# Altium PCB 车身411.pcbdoc
Units mil, origin at the board's own origin, x right, y up, seen from the top; angles counter-clockwise.
Board outline 4935 x 4957.5 mil, 2 copper layers (Top Layer, Bottom Layer); 16 components, 44 nets, 166 pads, 0 vias.
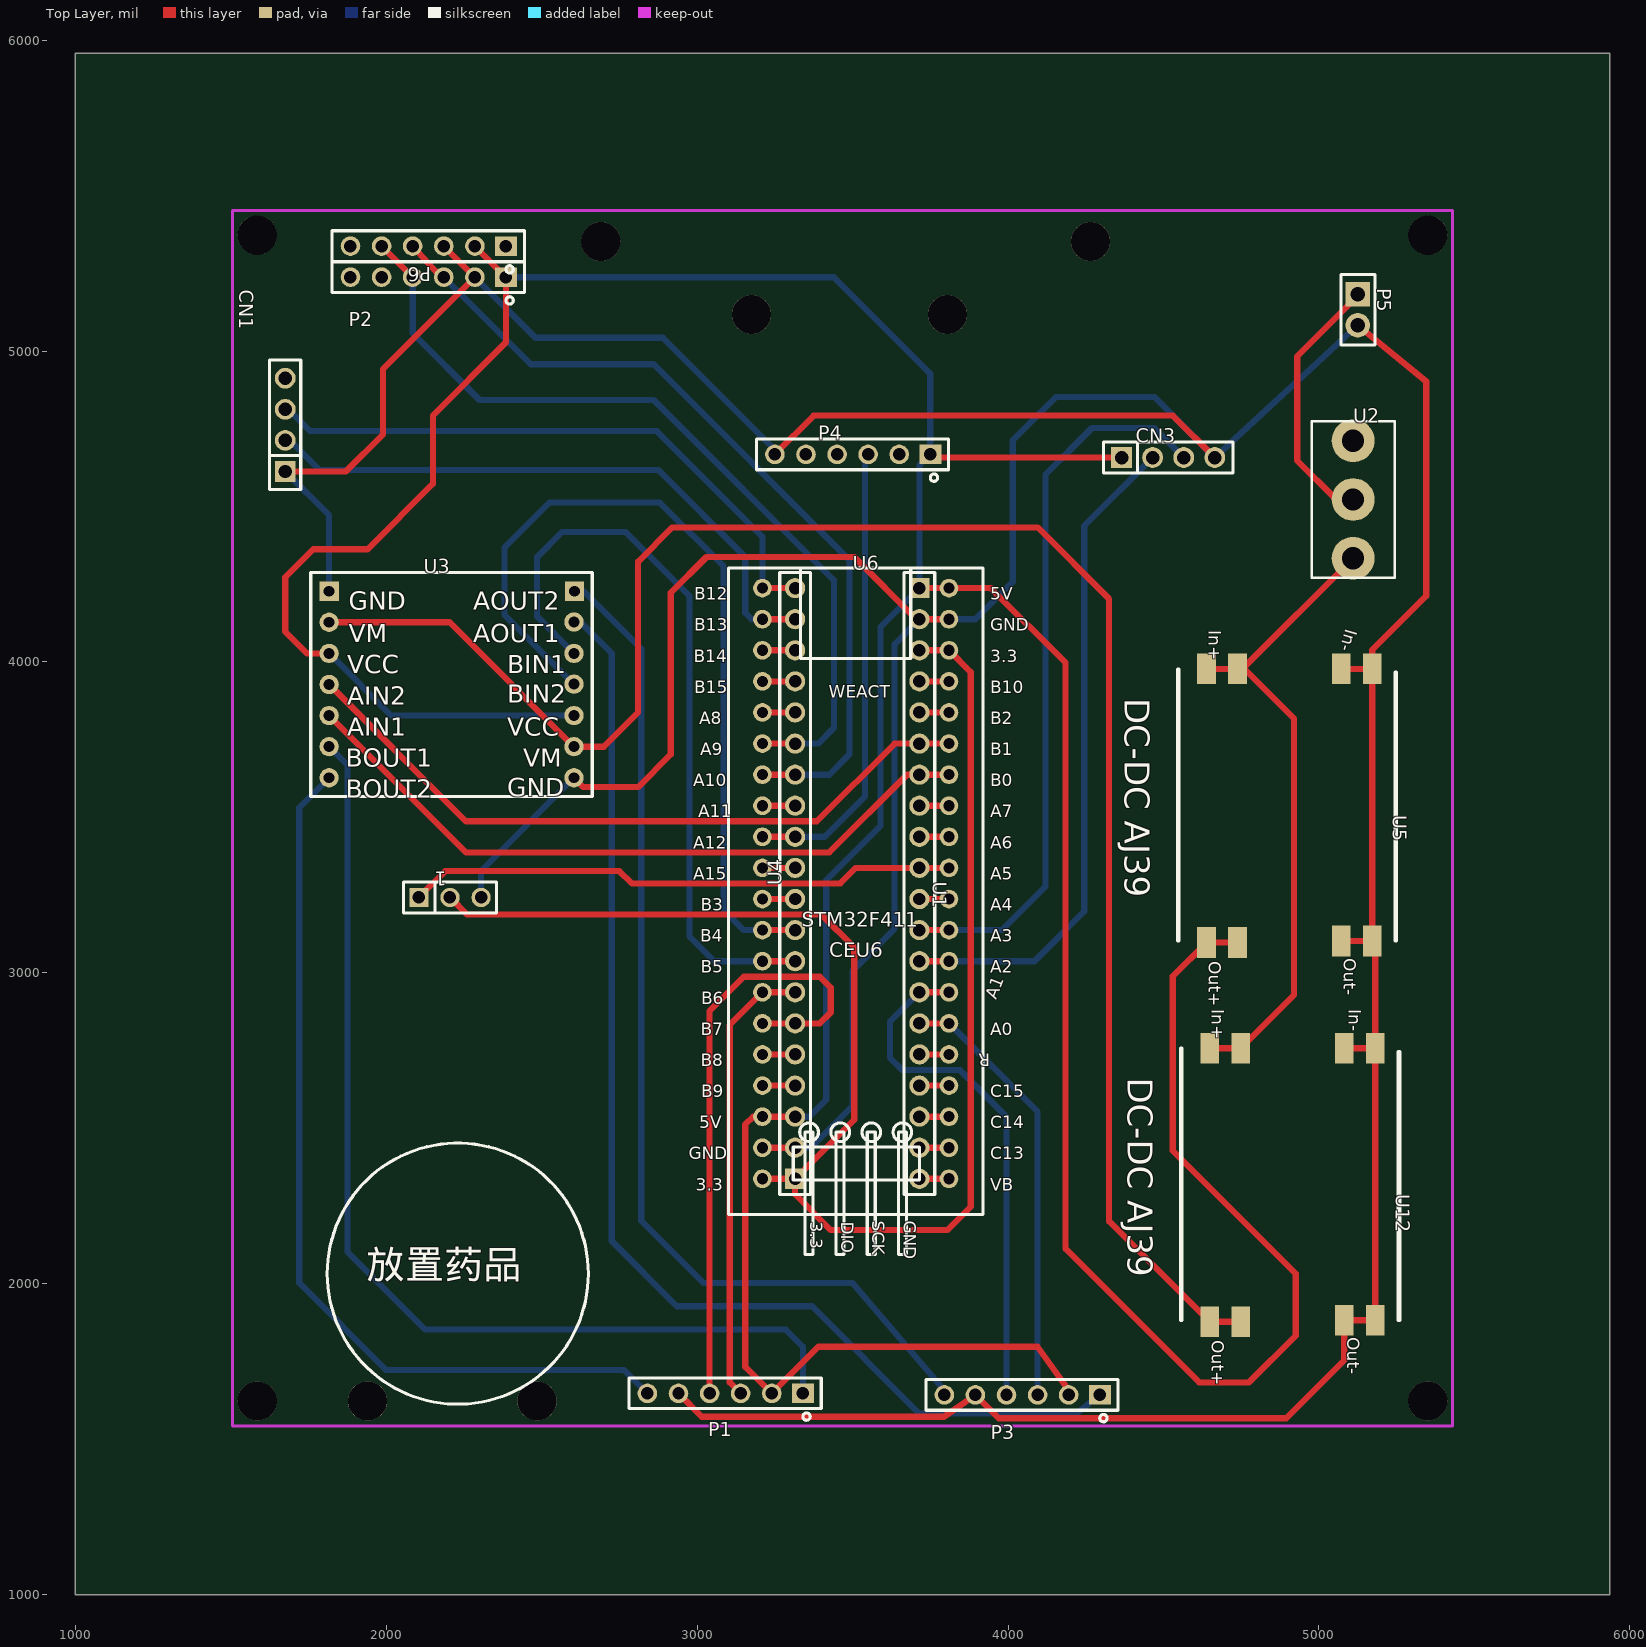
[diagram p0: Top Layer view]
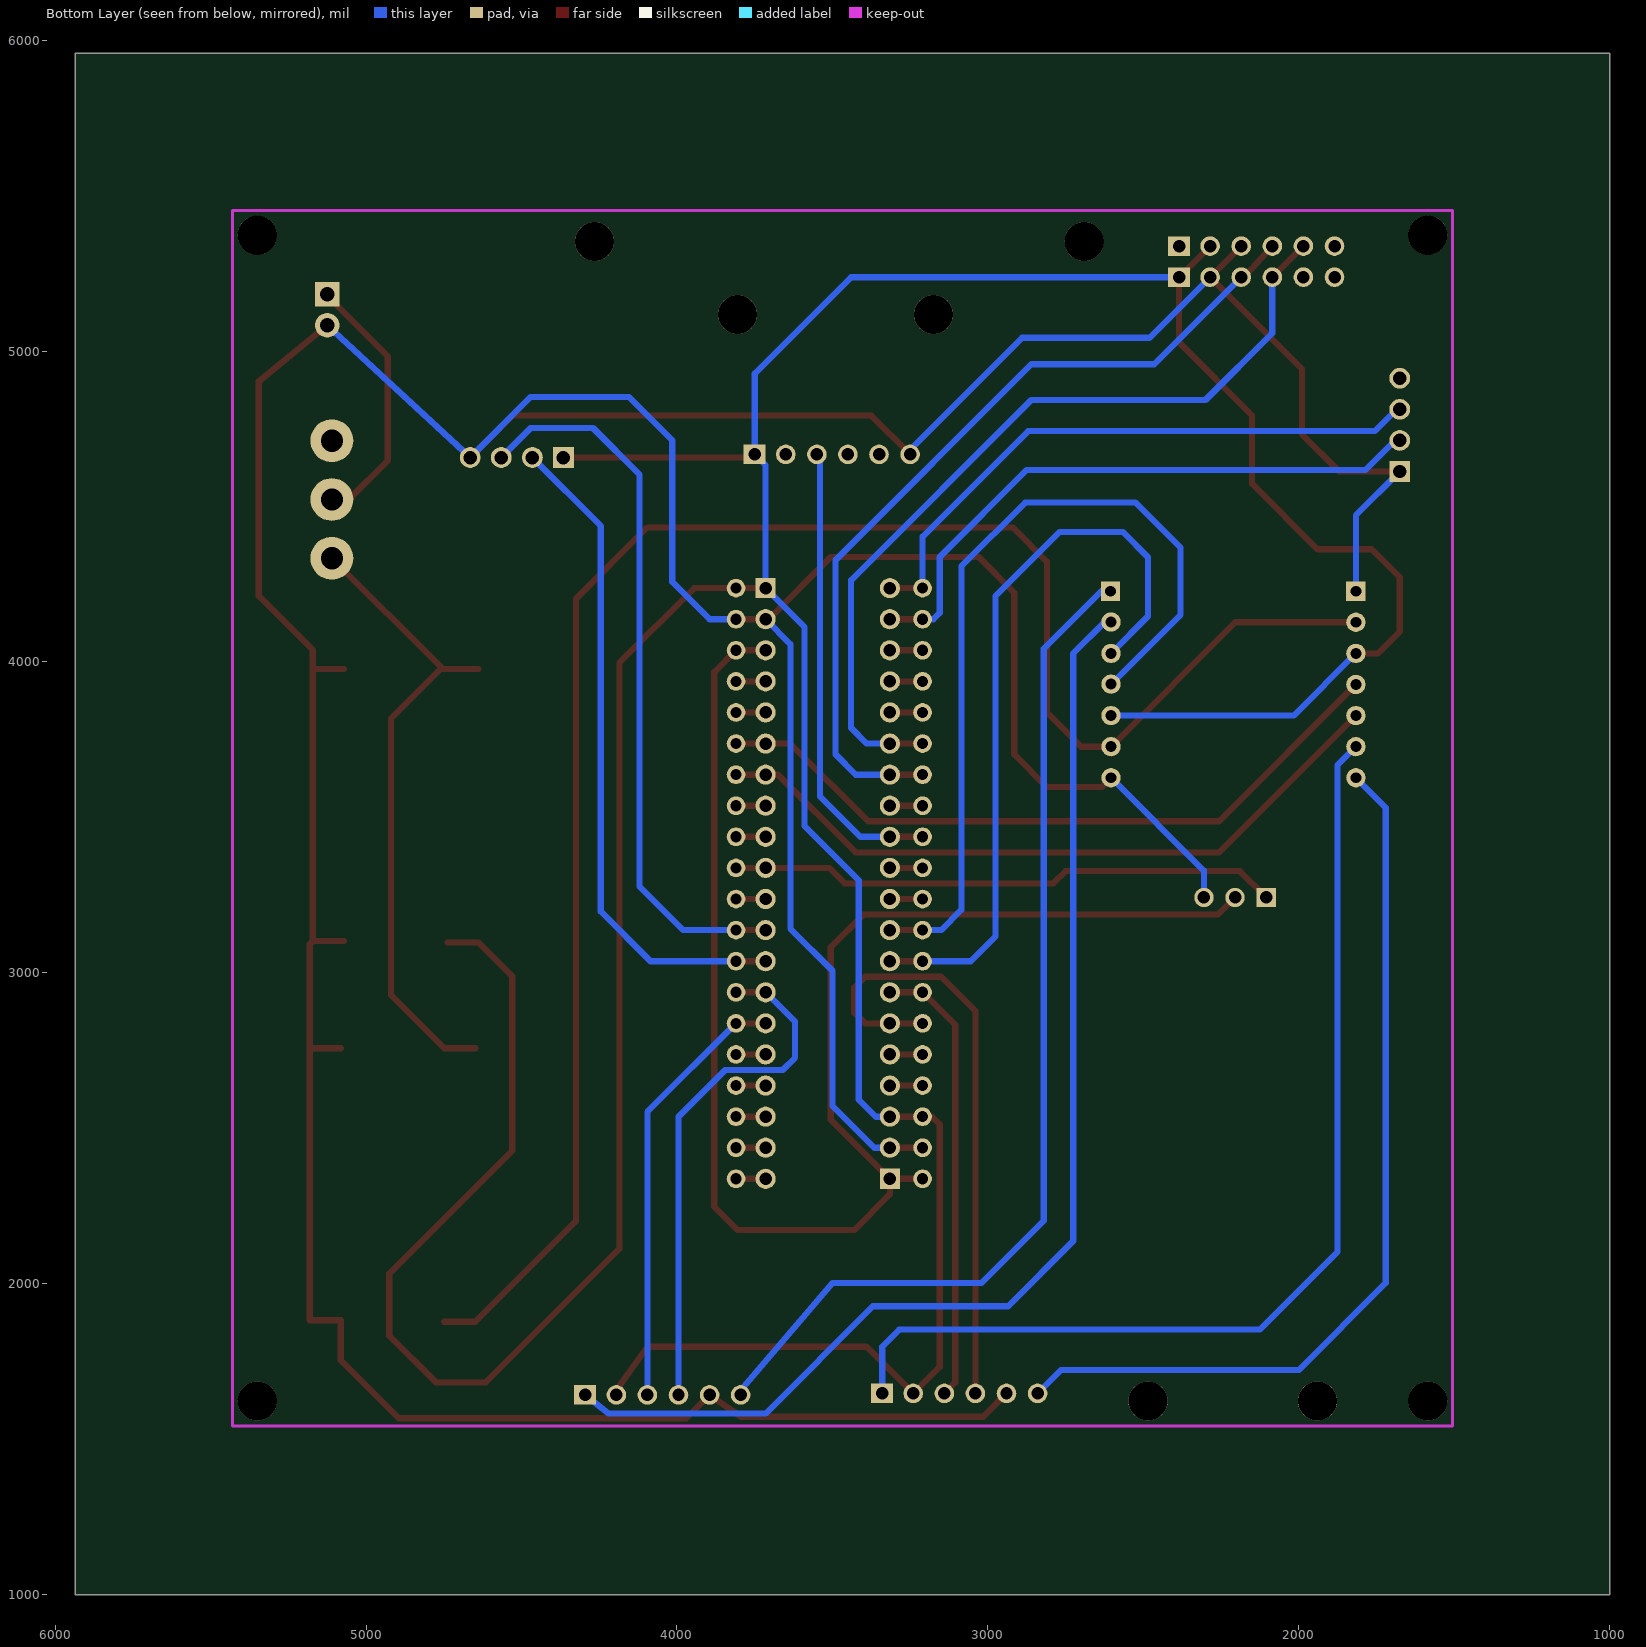
[diagram p1: Bottom Layer view, seen from below]

## Layer stack, top to bottom
Top Layer: signal copper (thickness not stored)
Dielectric: dielectric 12.6, FR-4, Dk 4.8
Bottom Layer: signal copper (thickness not stored)

## Board outline
5935,1000 1000,1000 1000,5957.5 5935,5957.5

## Components (designator, comment, footprint, x,y, rotation, side; value= is the part's Value field where it differs from the comment)
1 "红外药物检测" HDR-TH_3P-P2.54-V-F 2205,3242.5 r0 top
CN1 "红绿指示灯" HDR-TH_4P-P2.54-V-F 1675,4762.5 r90 top
CN3 "openmv接口" HDR-TH_4P-P2.54-V-F 4515,4657.5 r0 top
P1 "电机2" HDR-TH_6P-P2.54-V-F 3090,1647.5 r180 top
P2 "WIFI串口1" HDR-TH_6P-P2.54-V-F 2135,5237.5 r180 top
P3 "电机1" HDR-TH_6P-P2.54-V-F 4045,1642.5 r180 top
P4 "激光避障" HDR-TH_6P-P2.54-V-F 3500,4667.5 r180 top
P5 "Header-Female-2.54_1x2" HDR-TH_2P-P2.54-V-F 5125,5132.5 r270 top
P6 "蓝牙串口1" HDR-TH_6P-P2.54-V-F 2135,5337.5 r180 top
U1 "PM254-1-20-Z-8.5" HDR-TH_20P-P2.54-V-F-2 3715,3287.5 r270 top
U2 "SS12D06-大开关" SS12D06开关 5110,4522.5 r0 top
U3 "A4950双路电机驱动模块" A4950双路电机驱动模块 2210,3927.5 r0 top
U4 "PM254-1-20-Z-8.5" HDR-TH_20P-P2.54-V-F-2 3315,3287.5 r90 top
U5 "5V稳压电源" DC-DC-AJ39 5250,3977.5 r270 top
U6 "WEACT STM32F411CEU6" "WEACT STM32F411CEU6" 3510,3337.5 r0 top
U12 "12V稳压电源" DC-DC-AJ39 5260,2757.5 r270 top

## Footprints (in the part's own frame and the unit in brackets; to place one, negate y for a bottom-side part, rotate by r counter-clockwise, add the part's x,y. Pads: shape width x height; smd on the part's side, far side on the other; paste and mask are expansions set on the pad)
A4950双路电机驱动模块 [mil]
  rect 62x62 hole 35 paste+0 mask+2: 1(-393.7,300) 8(395.7,300)
  round 62 hole 35 paste+0 mask+2: 2(-393.7,200) 3(-393.7,100) 4(-393.7,0) 5(-393.7,-100) 6(-393.7,-200) 7(-393.7,-300) 9(393.7,201) 10(393.7,100) 11(393.7,1) 12(393.7,-100) 13(393.7,-200) 14(393.7,-300)
  silkscreen extent -453,-360 453,360
DC-DC-AJ39 [mm]
  rect 2.5x1.524 smd paste+0 mask+0.102: 1(0,-2) 2(0,-4.54) 3(0,-13) 4(0,-15.54) 5(22.352,-15.54) 6(22.352,-13) 7(22.225,-4.54) 8(22.225,-2)
  silkscreen extent 0,-17.91 22.23,0
HDR-TH_2P-P2.54-V-F [mm]
  rect 2x2 hole 1.2 paste+0 mask+0.051: 1(-1.27,0)
  round 2 hole 1.2 paste+0 mask+0.051: 2(1.27,0)
  silkscreen extent -2.88,-1.39 2.88,1.4
HDR-TH_3P-P2.54-V-F [mil]
  rect 62x62 hole 40.16 paste+0 mask+2: 1(-100,0)
  round 62 hole 40.16 paste+0 mask+2: 2(0,0) 3(100,0)
  silkscreen extent -150,-50 150,50
HDR-TH_4P-P2.54-V-F [mm]
  rect 1.7x1.7 hole 1.1 paste+0 mask+0.051: 1(-3.81,0)
  round 1.7 hole 1.1 paste+0 mask+0.051: 2(-1.27,0) 3(1.27,0) 4(3.81,0)
  silkscreen extent -5.29,-1.27 5.29,1.27
HDR-TH_6P-P2.54-V-F [mm]
  rect 1.8x1.6 hole 1.02 paste+0 mask+0.051: 1(-6.35,0)
  round 1.6 hole 1.02 paste+0 mask+0.051: 2(-3.81,0) 3(-1.27,0) 4(1.27,0) 5(3.81,0) 6(6.35,0)
  silkscreen extent -7.85,-1.25 7.85,2.2
HDR-TH_20P-P2.54-V-F-2 [mm]
  rect 1.65x1.65 hole 1.02 paste+0 mask+0.051: 1(-24.13,0)
  round 1.65 hole 1.02 paste+0 mask+0.051: 2(-21.59,0) 3(-19.05,0) 4(-16.51,0) 5(-13.97,0) 6(-11.43,0) 7(-8.89,0) 8(-6.35,0) 9(-3.81,0) 10(-1.27,0) 11(1.27,0) 12(3.81,0) 13(6.35,0) 14(8.89,0) 15(11.43,0) 16(13.97,0) 17(16.51,0) 18(19.05,0) 19(21.59,0) 20(24.13,0)
  silkscreen extent -25.4,-1.25 25.4,1.25
SS12D06开关 [mm]
  round 3.5 hole 1.8 paste+0 mask+0.051: 1(0,4.8) 2(0,0) 3(0,-4.8)
  silkscreen extent -3.4,-6.4 3.4,6.4
"WEACT STM32F411CEU6" [mil]
  round 60 hole 36 paste+0 mask+2: 1(300,900) 2(300,800) 3(300,700) 4(300,600) 5(300,500) 6(300,400) 7(300,300) 8(300,200) 9(300,100) 10(300,0) 11(300,-100) 12(300,-200) 13(300,-300) 14(300,-400) 15(300,-500) 16(300,-600) 17(300,-700) 18(300,-800) 19(300,-900) 20(300,-1000) 21(-300,-1000) 22(-300,-900) 23(-300,-800) 24(-300,-700) 25(-300,-600) 26(-300,-500) 27(-300,-400) 28(-300,-300) 29(-300,-200) 30(-300,-100) 31(-300,0) 32(-300,100) 33(-300,200) 34(-300,300) 35(-300,400) 36(-300,500) 37(-300,600) 38(-300,700) 39(-300,800) 40(-300,900)
  silkscreen extent -409,-1244 409,965

## Free pads (board coordinates)
  round 125.98 hole 125.98 unplated paste+0: ""(1585,1622.5) ""(1585,5372.5) ""(1940,1622.5) ""(2485,1622.5) ""(2690,5352.5) ""(3175,5117.5) ""(3805,5117.5) ""(4265,5352.5) ""(5350,1622.5) ""(5350,5372.5)

## Nets (pads, with @x,y where several pads share a name; then routed paths per layer and width w, separated by ;. In a path a pad name is that pad's centre, name@x,y a point inside that pad or via, vN(x,y) a via of type N, cw(c..) or ccw(c..) an arc to the next point about the centre after c; other vN are vias at no path point)
3V: 1.2 U1.3 U4.1 U6.3 U6.21 | length 4882.7
  Top Layer w20: 1.2 2260,3187.5 3400,3187.5 3505,3082.5 3505,2527.5 U4.1 3315,2287.5 3430,2172.5 3805,2172.5 3880,2247.5 3880,3967.5 U6.3 U1.3@3730,4037.5 ; U6.21 U4.1@3310,2337.5
+5V: CN3.1 P1.2 P2.1 P3.2 P4.1 P6.2 U1.1 U3.3 U3.12 U4.3 U5.5 U5.6 U6.1 U6.23 | length 14575.5
  Top Layer w20: U3.3 1745,4027.5 1675,4097.5 1675,4272.5 1765,4362.5 1940,4362.5 2150,4572.5 2150,4792.5 2385,5027.5 P2.1 P6.2 ; U4.3@3310,2537.5 U6.23 3180,2537.5 3155,2512.5 3155,1732.5 P1.2 3390,1797.5 4095,1797.5 P3.2@4195,1657.5 ; U1.1@3730,4237.5 U6.1 3945,4237.5 4185,3997.5 4185,2112.5 4615,1682.5 4775,1682.5 4925,1832.5 4925,2032.5 4530,2427.5 4530,2989.3 U5.5 U5.6 ; P4.1 3760,4657.5 CN3.1
  Bottom Layer w20: U3.3 2016.3,3827.5 U3.12 ; P2.1 3440,5237.5 3750,4927.5 P4.1 3715,4632.5 U1.1 3590,4112.5 3590,3472.5 3415,3297.5 3415,2592.5 3360,2537.5 U4.3
+12V: U3.2 U3.13 U12.5 U12.6 | length 5904.7
  Top Layer w20: U3.2 2203.7,4127.5 U3.13 2700,3727.5 2810,3837.5 2810,4322.5 2920,4432.5 4095,4432.5 4325,4202.5 4325,2200.7 U12.5 U12.6
ADC: 1.1 U1.10 U6.10 | length 1762.5
  Top Layer w20: 1.1 2190,3327.5 2750,3327.5 2790,3287.5 3460,3287.5 3510,3337.5 U1.10 ; U1.10@3730,3337.5 U6.10
AO1: P3.1 U3.9 | length 3874
  Bottom Layer w20: U3.9 2624,4128.5 2725,4027.5 2725,2137.5 2935,1927.5 3370,1927.5 3715,1582.5 4219.9,1582.5 P3.1
AO2: P3.6 U3.8 | length 3347.7
  Bottom Layer w20: U3.8 2635,4227.5 2820,4042.5 2820,2202.5 3020,2002.5 3500,2002.5 P3.6@3795,1657.5
BO1: P1.1 U3.6 | length 3390.6
  Bottom Layer w20: U3.6 1875,3668.8 1875,2102.5 2125,1852.5 3285,1852.5 3340,1797.5 P1.1
BO2: P1.6 U3.7 | length 2931.9
  Bottom Layer w20: U3.7 1720,3531.2 1720,2002.5 2000,1722.5 2765,1722.5 P1.6
ENA1: P3.3 U1.15 U6.15 | length 1378.1
  Top Layer w20: U1.15@3730,2837.5 U6.15
  Bottom Layer w20: U6.15 4095,2552.5 P3.3@4095,1657.5
ENA2: P3.4 U1.14 U6.14 | length 1663.1
  Top Layer w20: U1.14@3730,2937.5 U6.14
  Bottom Layer w20: U1.14 3620,2842.5 3620,2727.5 3660,2687.5 3845,2687.5 3995,2537.5 P3.4@3995,1657.5
ENB1: P1.3 U4.7 U6.27 | length 1448
  Top Layer w20: P1.3 3105,1682.5 3105,2832.5 U6.27 U4.7@3310,2937.5
ENB2: P1.4 U4.6 U6.26 | length 1989.6
  Top Layer w20: P1.4 3040,2877.5 3150,2987.5 3395,2987.5 3430,2952.5 3430,2872.5 3395,2837.5 U4.6 ; U6.26 U4.6@3310,2837.5
GLED: CN1.3 U4.20 U6.40 | length 1969.8
  Top Layer w20: U6.40 U4.20@3310,4237.5
  Bottom Layer w20: CN1.3 1685,4812.5 1755,4742.5 2870,4742.5 3210,4402.5 U6.40
GND: 1.3 CN1.1 CN3.4 P1.5 P2.2 P3.5 P4.6 P5.2 P6.3 U1.2 U3.1 U3.14 U4.2 U5.1 U5.2 U5.7 U5.8 U6.2 U6.22 U12.1 U12.2 U12.7 U12.8 | length 17047.1
  Top Layer w20: CN1.1 1870,4612.5 1990,4732.5 1990,4942.5 P2.2 P6.3 ; U3.14 2633.7,3597.5 2810,3597.5 2915,3702.5 2915,4222.5 3030,4337.5 3505,4337.5 3705,4137.5 U1.2 ; P1.5 3015,1572.5 3793.8,1572.5 P3.5 3970,1567.5 4895,1567.5 5081.3,1753.8 U12.7 ; U6.22 U4.2@3310,2437.5 ; P4.6 3375,4792.5 4530,4792.5 CN3.4 ; U1.2@3730,4137.5 U6.2 ; U5.7 U5.8 ; U5.2 U5.1 ; U12.7 U12.8 U12.1 ; U12.2 U12.1 ; P5.2 5345,4902.5 5345,4212.5 5171.26,4038.76 U5.1 ; U5.8 U5.1 ; U5.8 5181.26,3092.5 U12.1
  Bottom Layer w20: CN1.1 1816.3,4471.2 U3.1 ; P2.2 2480,5042.5 2890,5042.5 3250,4682.5 P4.6 ; 1.3 2305,3328.8 U3.14 ; U4.2 3365,2437.5 3500,2572.5 3500,3007.5 3635,3142.5 3635,4057.5 U1.2 ; U6.2 3895,4137.5 4015,4257.5 4015,4712.5 4155,4852.5 4470,4852.5 CN3.4 P5.2
PWMA1: U1.7 U3.5 U6.7 | length 2264.5
  Top Layer w20: U3.5 2256.3,3387.5 3425,3387.5 3675,3637.5 U1.7 ; U1.7@3730,3637.5 U6.7
PWMA2: U1.6 U3.4 U6.6 | length 2264.5
  Top Layer w20: U3.4 2256.3,3487.5 3385,3487.5 3635,3737.5 U1.6 ; U1.6@3730,3737.5 U6.6
PWMB1: U3.11 U4.9 U6.29 | length 2738.6
  Top Layer w20: U6.29 U4.9@3310,3137.5
  Bottom Layer w20: U3.11 2380,4152.2 2380,4367.5 2525,4512.5 2880,4512.5 3085,4307.5 3085,3202.5 3150,3137.5 U6.29
PWMB2: U3.10 U4.8 U6.28 | length 2430.4
  Top Layer w20: U6.28 U4.8@3310,3037.5
  Bottom Layer w20: U3.10 2485,4146.2 2485,4337.5 2565,4417.5 2770,4417.5 2975,4212.5 2975,3117.5 3055,3037.5 U6.28
RLED: CN1.2 U4.19 U6.39 | length 1978.6
  Top Layer w20: U6.39 U4.19@3310,4137.5
  Bottom Layer w20: CN1.2 1690,4712.5 1785,4617.5 2875,4617.5 3155,4337.5 3155,4157.5 3175,4137.5 U6.39
RX1: P2.3 P6.4 U4.14 U6.34 | length 2757.5
  Top Layer w20: P6.4 P2.3@2185,5227.5 ; U6.34 U4.14@3310,3637.5
  Bottom Layer w20: P2.3 2465,4957.5 2860,4957.5 3490,4327.5 3490,3702.5 3425,3637.5 U4.14
RX2: CN3.3 U1.12 U6.12 | length 2319.5
  Top Layer w20: U1.12@3730,3137.5 U6.12
  Bottom Layer w20: U6.12 3980,3137.5 4120,3277.5 4120,4602.5 4270,4752.5 4470,4752.5 CN3.3
RX6: P4.3 U4.12 U6.32 | length 1488.8
  Top Layer w20: U6.32 U4.12@3310,3437.5
  Bottom Layer w20: U4.12 3410,3437.5 3540,3567.5 3540,4667.5 P4.3
TX1: P2.4 P6.5 U4.15 U6.35 | length 2719.4
  Top Layer w20: P6.5@1990,5332.5 P2.4 ; U6.35 U4.15@3310,3737.5
  Bottom Layer w20: P2.4 2085,5057.5 2300,4842.5 2860,4842.5 3440,4262.5 3440,3787.5 3390,3737.5 U4.15
TX2: CN3.2 U1.13 U6.13 | length 2132.4
  Top Layer w20: U1.13@3730,3037.5 U6.13
  Bottom Layer w20: U6.13 4085,3037.5 4245,3197.5 4245,4437.5 CN3.2
U6_4: U1.4 U6.4 | length 80
  Top Layer w20: U1.4@3730,3937.5 U6.4
U6_5: U1.5 U6.5 | length 80
  Top Layer w20: U1.5@3730,3837.5 U6.5
U6_8: U1.8 U6.8 | length 80
  Top Layer w20: U1.8@3730,3537.5 U6.8
U6_9: U1.9 U6.9 | length 80
  Top Layer w20: U1.9@3730,3437.5 U6.9
U6_11: U1.11 U6.11 | length 80
  Top Layer w20: U1.11@3730,3237.5 U6.11
U6_16: U1.16 U6.16 | length 80
  Top Layer w20: U1.16@3730,2737.5 U6.16
U6_17: U1.17 U6.17 | length 80
  Top Layer w20: U1.17@3730,2637.5 U6.17
U6_18: U1.18 U6.18 | length 80
  Top Layer w20: U1.18@3730,2537.5 U6.18
U6_19: U1.19 U6.19 | length 80
  Top Layer w20: U1.19@3730,2437.5 U6.19
U6_20: U1.20 U6.20 | length 80
  Top Layer w20: U1.20@3730,2337.5 U6.20
U6_24: U4.4 U6.24 | length 100
  Top Layer w20: U6.24 U4.4@3310,2637.5
U6_25: U4.5 U6.25 | length 100
  Top Layer w20: U6.25 U4.5@3310,2737.5
U6_30: U4.10 U6.30 | length 100
  Top Layer w20: U6.30 U4.10@3310,3237.5
U6_31: U4.11 U6.31 | length 100
  Top Layer w20: U6.31 U4.11@3310,3337.5
U6_33: U4.13 U6.33 | length 100
  Top Layer w20: U6.33 U4.13@3310,3537.5
U6_36: U4.16 U6.36 | length 100
  Top Layer w20: U6.36 U4.16@3310,3837.5
U6_37: U4.17 U6.37 | length 100
  Top Layer w20: U6.37 U4.17@3310,3937.5
U6_38: U4.18 U6.38 | length 100
  Top Layer w20: U6.38 U4.18@3310,4037.5
VCC: P5.1 U2.2 | length 854.6
  Top Layer w20: U2.2 5055,4522.5 4930,4647.5 4930,4982.5 5130,5182.5 P5.1
VCCIN: U2.3 U5.3 U5.4 U12.3 U12.4 | length 2098.5
  Top Layer w20: U5.4 U5.3 ; U12.4 U12.3 4920,2929.31 4920,3817.5 4760,3977.5 U5.3 ; U2.3 4753.98,3977.5 U5.3
pads on no net: CN1.4 P2.5 P2.6 P4.2 P4.4 P4.5 P6.1 P6.6 U2.1

## Silkscreen, mask and mechanical layers (free items; w line width, h text height)
Top Overlay:
  circle w10: c2230,2032.5 r420
  text "放置药品" at 1935,1987.5 h157.48
Document:
  lines w0.1: 3467.49,3478.74 3467.51,3478.76

## Text inside footprints (layer, text, board x,y; h text height)
U3: Top Overlay "GND" at 1878.7,4167.97 h59.05; Top Overlay "VM" at 1880,4062.97 h59.05; Top Overlay "VCC" at 1875,3962.97 h59.05; Top Overlay "AIN2" at 1875,3862.97 h59.05; Top Overlay "AIN1" at 1875,3762.97 h59.05; Top Overlay "BOUT1" at 1870,3662.97 h59.05; Top Overlay "BOUT2" at 1870,3562.97 h59.05; Top Overlay "AOUT2" at 2280,4167.97 h59.05; Top Overlay "AOUT1" at 2280,4062.97 h59.05; Top Overlay "BIN1" at 2390,3962.97 h59.05; Top Overlay "BIN2" at 2390,3867.97 h59.05; Top Overlay "VCC" at 2390,3762.97 h59.05; Top Overlay "VM" at 2440,3662.97 h59.05; Top Overlay "GND" at 2390,3567.97 h59.05
U5: Top Overlay "In-" at 5086.08,4107.93 h39.37 r254; Top Overlay "Out-" at 5080.31,3047.5 h39.37 r270; Top Overlay "In+" at 4645.31,4102.5 h39.37 r270; Top Overlay "Out+" at 4645.31,3037.5 h39.37 r270; Top Overlay "DC-DC AJ39" at 4375,3882.5 h80 r270
U6: Top Overlay "5V" at 3943.07,4199.7 h39.37; Top Overlay "GND" at 3943.07,4099.7 h39.37; Top Overlay "3.3" at 3943.07,3999.7 h39.37; Top Overlay "B10" at 3943.07,3899.7 h39.37; Top Overlay "B2" at 3943.07,3799.7 h39.37; Top Overlay "B1" at 3943.07,3699.7 h39.37; Top Overlay "B0" at 3943.07,3599.7 h39.37; Top Overlay "A7" at 3943.07,3499.7 h39.37; Top Overlay "A6" at 3943.07,3399.7 h39.37; Top Overlay "A5" at 3943.07,3299.7 h39.37; Top Overlay "A4" at 3943.07,3199.7 h39.37; Top Overlay "A3" at 3943.07,3099.7 h39.37; Top Overlay "A2" at 3943.07,2999.7 h39.37; Top Overlay "A1" at 3961.45,2912.34 h39.37 r69; Top Overlay "A0" at 3943.07,2799.7 h39.37; Top Overlay "R" at 3943.07,2739.07 h39.37 r180; Top Overlay "C15" at 3943.07,2599.7 h39.37; Top Overlay "C14" at 3943.07,2499.7 h39.37; Top Overlay "C13" at 3943.07,2399.7 h39.37; Top Overlay "VB" at 3943.07,2299.7 h39.37; Top Overlay "3.3" at 2995.71,2299.7 h39.37; Top Overlay "GND" at 2972.42,2399.7 h39.37; Top Overlay "5V" at 3007.52,2499.7 h39.37; Top Overlay "B9" at 3012.92,2599.7 h39.37; Top Overlay "B8" at 3011.11,2699.7 h39.37; Top Overlay "B7" at 3011.11,2799.7 h39.37; Top Overlay "B6" at 3012.92,2899.7 h39.37; Top Overlay "B5" at 3011.11,2999.7 h39.37; Top Overlay "B4" at 3009.31,3099.7 h39.37; Top Overlay "B3" at 3011.11,3199.7 h39.37; Top Overlay "A15" at 2986.71,3299.7 h39.37; Top Overlay "A12" at 2986.71,3399.7 h39.37; Top Overlay "A11" at 3002.82,3499.7 h39.37; Top Overlay "A10" at 2986.71,3599.7 h39.37; Top Overlay "A9" at 3009.31,3699.7 h39.37; Top Overlay "A8" at 3007.52,3799.7 h39.37; Top Overlay "B15" at 2990.32,3899.7 h39.37; Top Overlay "B14" at 2988.51,3999.7 h39.37; Top Overlay "B13" at 2990.32,4099.7 h39.37; Top Overlay "B12" at 2990.32,4199.7 h39.37; Top Overlay "3.3" at 3363.93,2199.31 h39.37 r270; Top Overlay "DIO" at 3463.93,2199.31 h39.37 r270; Top Overlay "SCK" at 3563.93,2203.24 h39.37 r270; Top Overlay "GND" at 3663.93,2203.24 h39.37 r270; Top Overlay "WEACT" at 3423.39,3884.74 h39.37; Top Overlay "STM32F411" at 3336.77,3148.53 h47.24; Top Overlay "CEU6" at 3424.17,3050.1 h47.24
U12: Top Overlay "In-" at 5095.31,2882.5 h39.37 r270; Top Overlay "Out-" at 5090.31,1827.5 h39.37 r270; Top Overlay "In+" at 4655.31,2882.5 h39.37 r270; Top Overlay "Out+" at 4655.31,1817.5 h39.37 r270; Top Overlay "DC-DC AJ39" at 4385,2662.5 h80 r270